# EAGLE board RFM69H_breakout (EAGLE 8.0.2)
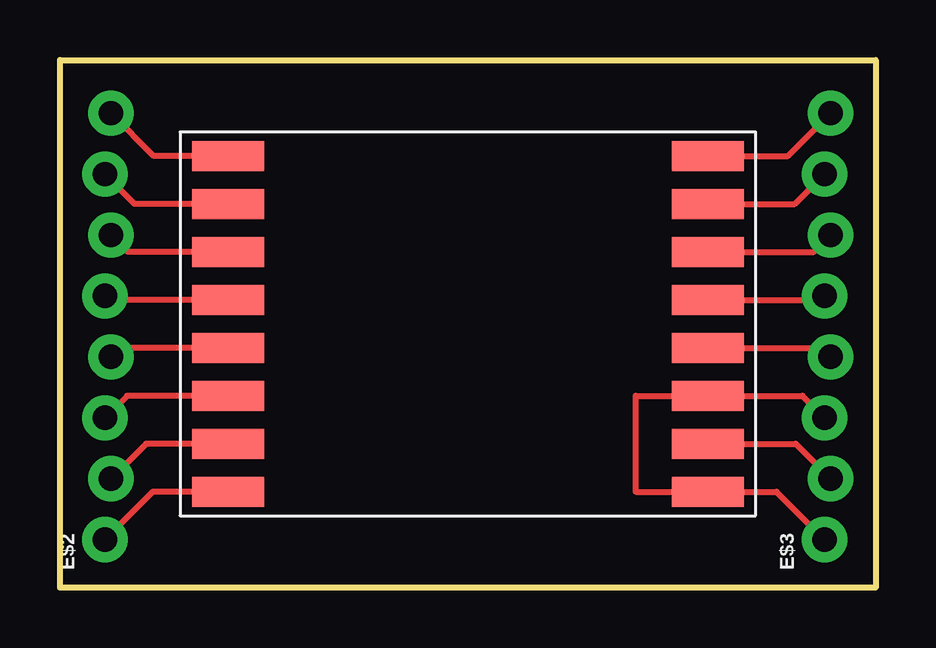
[diagram p0: board, top side]

Size 34 x 22 mm. Coordinates in mm from the lower left corner, seen from the top.
Outline: 0,22 34,22 34,0 0,0 0,22
Copper layers (1*16): Top 0.035mm / dielectric 1.5mm / Bottom 0.035mm
Design rules "default": minimum track width 10mil, minimum drill 24mil, track to track 8mil, track to pad 8mil, pad to pad 8mil, via to via 8mil, smd to smd 8mil, copper to edge 40mil, drill to drill 8mil, minimum pad ring 10mil, minimum via ring 8mil, stop-mask expansion 4mil, vias tented up to drill 0mil, thermal gap 10mil

## Footprints (pad centres in the part's own frame; a part is rotated, then mirrored left to right if it is on the bottom)
HELLO = smd 3 x 1.25: P$1 0,0; P$2 0,-2; P$3 0,-4; P$4 0,-6; P$5 0,-8; P$6 0,-10; P$7 0,-12; P$8 0,-14; P$9 20,0; P$10 20,-2; P$11 20,-4; P$12 20,-6; P$13 20,-8; P$14 20,-10; P$15 20,-12; P$16 20,-14
1X08_LOCK_NO_SILK = drill 1.016 pad 1.88: 1 0,0.127; 2 2.54,-0.127; 3 5.08,0.127; 4 7.62,-0.127; 5 10.16,0.127; 6 12.7,-0.127; 7 15.24,0.127; 8 17.78,-0.127

## Placement (x,y rotation side)
E$1  [HELLO]  7,18 0 top
E$2  [1X08_LOCK_NO_SILK]  2,2 90 top
E$3  [1X08_LOCK_NO_SILK]  32,2 90 top

## Library data of the parts
E$1 = rfm69h
E$2 E$3 = SparkFun-Connectors

## Nets
S$1: E$1.P$14 E$1.P$16 E$3.1 E$3.3
S$2: E$1.P$15 E$3.2
S$3: E$1.P$13 E$3.4
S$4: E$1.P$12 E$3.5
S$5: E$1.P$11 E$3.6
S$6: E$1.P$10 E$3.7
S$7: E$1.P$9 E$3.8
S$8: E$1.P$8 E$2.1
S$9: E$1.P$7 E$2.2
S$10: E$1.P$6 E$2.3
S$11: E$1.P$5 E$2.4
S$12: E$1.P$4 E$2.5
S$13: E$1.P$3 E$2.6
S$14: E$1.P$2 E$2.7
S$15: E$1.P$1 E$2.8

## Tracks (layer width: path | path; a pad name or v marks a point on that pad's centre or on a via)
S$1
  Top 0.254: E$3.3 30.95,8 E$1.P$14 24,8 24,4 E$1.P$16 29.87,4 E$3.1
S$2
  Top 0.254: E$1.P$15 30.67,6 E$3.2
S$3
  Top 0.254: E$1.P$13 31.75,10 E$3.4
S$4
  Top 0.254: E$1.P$12 31.71,12 E$3.5
S$5
  Top 0.254: E$1.P$11 31.43,14 E$3.6
S$6
  Top 0.254: E$1.P$10 30.63,16 E$3.7
S$7
  Top 0.254: E$1.P$9 30.35,18 E$3.8
S$8
  Top 0.254: E$1.P$8 3.87,4 E$2.1
S$9
  Top 0.254: E$1.P$7 3.59,6 E$2.2
S$10
  Top 0.254: E$1.P$6 2.79,8 E$2.3
S$11
  Top 0.254: E$1.P$5 2.51,10 E$2.4
S$12
  Top 0.254: E$1.P$4 2.03,12 E$2.5
S$13
  Top 0.254: E$1.P$3 2.83,14 E$2.6
S$14
  Top 0.254: E$1.P$2 3.11,16 E$2.7
S$15
  Top 0.254: E$1.P$1 3.91,18 E$2.8